# Altium PCB rs485.PcbDoc
Units mil, origin at the board's own origin, x right, y up, seen from the top; angles counter-clockwise.
Board outline 2519.68 x 1181.1 mil, 2 copper layers (Top Layer, Bottom Layer); 35 components, 33 nets, 133 pads, 0 vias.
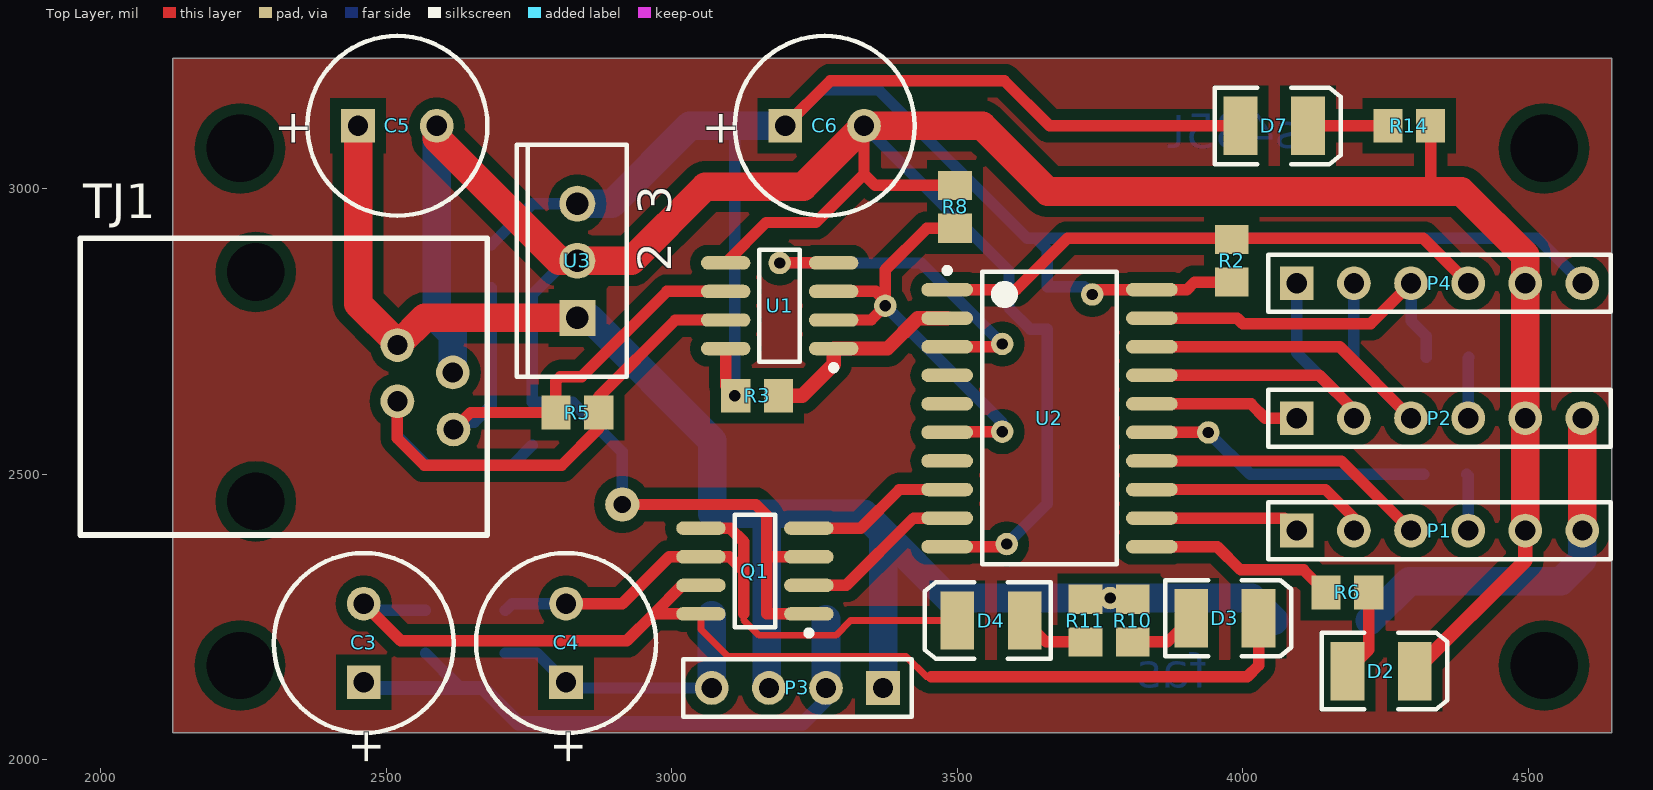
[diagram p0: Top Layer view]
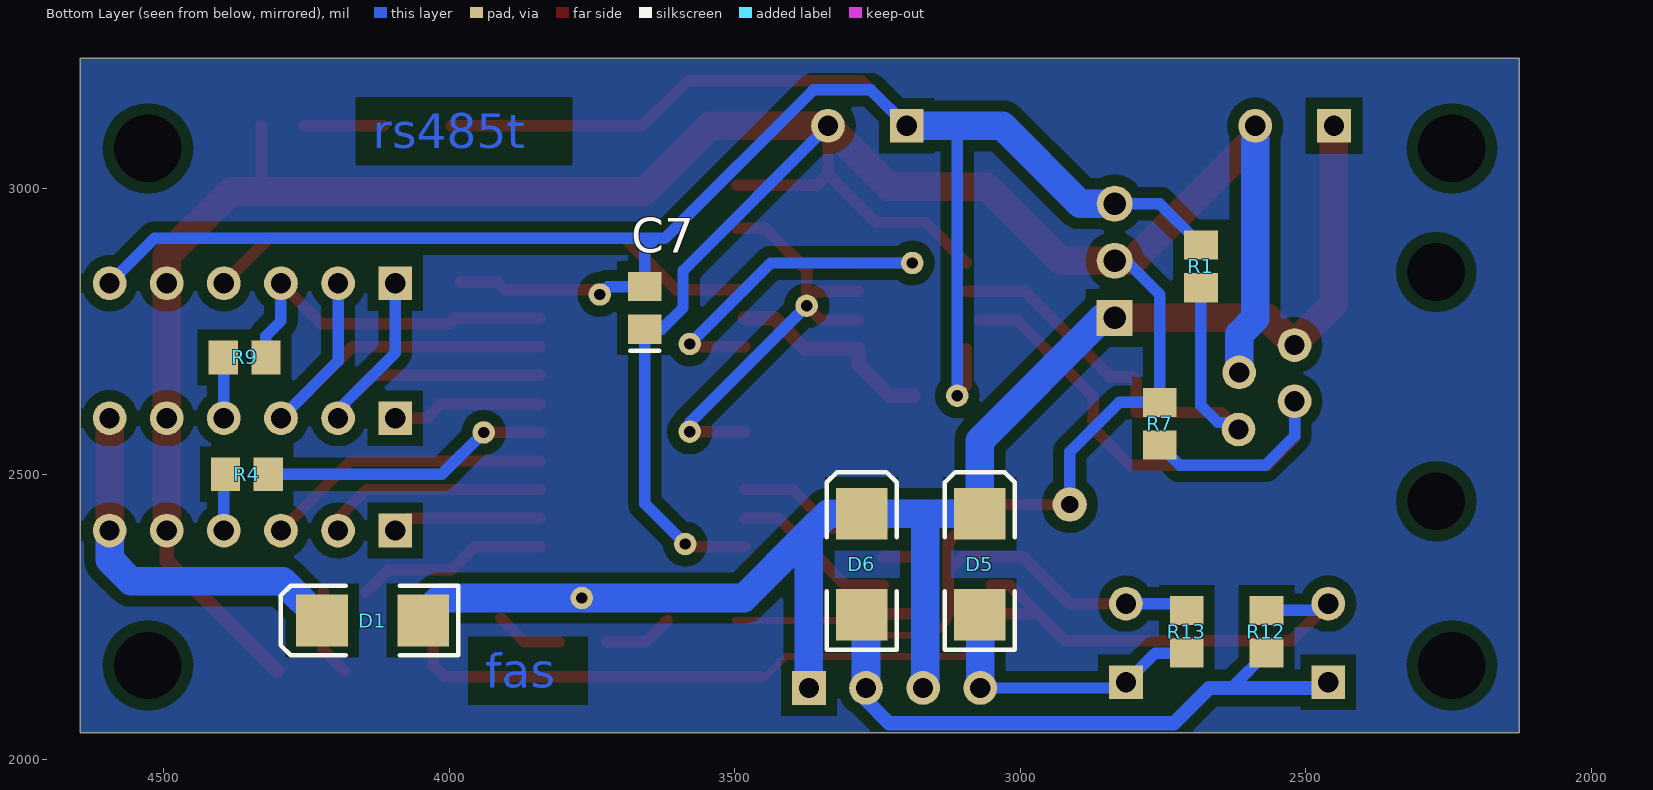
[diagram p1: Bottom Layer view, seen from below]

## Layer stack, top to bottom
Top Layer: signal copper 1.4
Dielectric: dielectric 12.6, FR-4, Dk 4.8
Bottom Layer: signal copper 1.4

## Board outline
2125.98,2047.24 4645.67,2047.24 4645.67,3228.35 2125.98,3228.35

## Design rules (kind name [scope] priority, off if disabled: settings)
Clearance [All] p1: gap=19.68
HoleSize [All] p1: absolutevalues=TRUE maxlimit=200 minlimit=1 maxpercent=80.000 minpercent=20.000
PolygonConnect [All] p1: connectstyle=Relief reliefconductorwidth=10 reliefentries=4 polygonreliefangle="90 Angle"
RoutingVias [All] p1: holewidth=28 width=50 viastyle="Through Hole" minholewidth=28 minwidth=50 maxholewidth=28 maxwidth=50
SilkscreenOverComponentPads [All] p1: minsilkscreentomaskgap=5
SolderMaskExpansion [All] p1: expansion=4
Width [All] p1: maxlimit=196.85 minlimit=10 preferedwidth=10
26 further rules are at their usual default settings.

## Components (designator, comment, footprint, x,y, rotation, side; value= is the part's Value field where it differs from the comment)
C3 "94SH107X0016EBP" E 2460.63,2204.72 r90 top
C4 "94SH107X0016EBP" E 2814.96,2204.72 r90 top
C5 "94SH107X0016EBP" E 2519.68,3110.24 r0 top
C6 "94SH107X0016EBP" E 3267.72,3110.24 r0 top
C7 "C0805" 0805 3657.48,2791.34 r90 bottom
D1 "D Schottky" SMB 4133.86,2244.09 r0 bottom
D2 "LED3" 3.5X2.8X1.9 4242.13,2155.51 r0 top
D3 "LED3" 3.5X2.8X1.9 3968.5,2248.03 r0 top
D4 "LED3" 3.5X2.8X1.9 3559.06,2244.09 r180 top
D5 "D Schottky" SMB 3070.87,2342.52 r90 bottom
D6 "D Schottky" SMB 3277.56,2342.52 r90 bottom
D7 "LED3" 3.5X2.8X1.9 4055.12,3110.24 r0 top
P1 "Header 6" HDR1X6 4094.49,2401.57 r0 top
P2 "Header 6" HDR1X6 4094.49,2598.43 r0 top
P3 "Header 4" HDR1X4 3370.08,2125.98 r180 top
P4 "Header 6" HDR1X6 4094.49,2834.65 r0 top
Q1 "IRF7313" SO-8_N 3145.67,2330.71 r180 top
R1 "ERAS" ERA-0805 2683.65,2864.17 r270 bottom
R2 "ERAS" ERA-0805 3980.32,2874.02 r90 top
R3 "ERAS" ERA-0805 3149.61,2637.8 r0 top
R4 "ERAS" ERA-0805 4354.33,2500 r0 bottom
R5 "ERAS" ERA-0805 2834.65,2608.27 r0 top
R6 "ERAS" ERA-0805 4183.07,2293.31 r0 top
R7 "ERAS" ERA-0805 2755.91,2588.58 r90 bottom
R8 "ERAS" ERA-0805 3496.06,2968.5 r90 top
R9 "ERAS" ERA-0805 4358.27,2704.72 r0 bottom
R10 "ERAS" ERA-0805 3807.09,2244.09 r270 top
R11 "ERAS" ERA-0805 3724.41,2244.09 r270 top
R12 "ERAS" ERA-0805 2568.9,2224.41 r90 bottom
R13 "ERAS" ERA-0805 2708.66,2224.41 r90 bottom
R14 "ERAS" ERA-0805 4291.34,3110.24 r0 top
TJ1 "TJ4-6P4C" TJ4-6P4C 2677.17,2913.39 r180 top
U1 "MAX485ESA" NSO8_N 3188.98,2795.28 r180 top
U2 "ATtiny2313-20SU" 20S_N 3661.42,2598.43 r0 top
U3 "MC7805ACT" 221A-06 2834.65,2874.02 r90 top

## Footprints (in the part's own frame and the unit in brackets; to place one, negate y for a bottom-side part, rotate by r counter-clockwise, add the part's x,y. Pads: shape width x height; smd on the part's side, far side on the other; paste and mask are expansions set on the pad)
3.5X2.8X1.9 [mm] "SM LED; 2 C-Bend Leads; Body 3.5 x 2.8 x 1.9 mm, inc leads (LxWxH typ)"
  rect 1.5x2.6 smd: 1(-1.5,0) 2(1.5,0)
  silkscreen extent -2.65,-1.7 2.95,1.7
20S_N [mm] "SOIC, 20-Leads, Body 12.8x7.5mm, Pitch 1.27mm, IPC Medium Density"
  oval 2.3x0.6 smd: 1(-4.55,5.715) 2(-4.55,4.445) 3(-4.55,3.175) 4(-4.55,1.905) 5(-4.55,0.635) 6(-4.55,-0.635) 7(-4.55,-1.905) 8(-4.55,-3.175) 9(-4.55,-4.445) 10(-4.55,-5.715) 11(4.55,-5.715) 12(4.55,-4.445) 13(4.55,-3.175) 14(4.55,-1.905) 15(4.55,-0.635) 16(4.55,0.635) 17(4.55,1.905) 18(4.55,3.175) 19(4.55,4.445) 20(4.55,5.715)
  silkscreen extent -4.67,-6.5 3,6.69, body extent -3.75,-6.5 3.75,6.5, height 2.65
221A-06 [mm] "TO, Thru-Hole, Vertical, Heatsink Mounted; 3 In-Line Leads; Pitch 2.54 mm"
  rect 1.6x1.6 hole 1: 1(-2.54,0)
  round 1.6 hole 1: 2(0,0) 3(2.54,0)
  silkscreen extent -5.15,-2.2 5.15,2.7
0805 [mm] "Chip Capacitor; Body 2.0 x 1.2 mm (LxW typ)"
  rect 1.3x1.5 smd: 1(-0.95,0) 2(0.95,0)
  silkscreen extent -1.9,-0.65 -1.9,0.65
E [mm] "Capacitor, Electrolytic, Radial; Body 8 x 10.5 mm (Dia.xH typ); Pin Spacing 3.5 mm (typ)"
  rect 1.5x1.5 hole 0.9: 1(-1.75,0)
  round 1.5 hole 0.9: 2(1.75,0)
  silkscreen extent -4,-4 4,4
ERA-0805 [mm] "Chip Resistor; Body 2 x 1.3 mm (LxW typ)"
  rect 1.3x1.5 smd: 1(-0.95,0) 2(0.95,0)
HDR1X4 [mm] "Connector; Header; 4 Position"
  rect 1.5x1.5 hole 0.9: 1(0,0)
  round 1.5 hole 0.9: 2(2.54,0) 3(5.08,0) 4(7.62,0)
  silkscreen extent -1.27,-1.27 8.89,1.27
HDR1X6 [mm] "Connector; Header; 6 Position"
  rect 1.5x1.5 hole 0.9: 1(0,0)
  round 1.5 hole 0.9: 2(2.54,0) 3(5.08,0) 4(7.62,0) 5(10.16,0) 6(12.7,0)
  silkscreen extent -1.27,-1.27 13.97,1.27
NSO8_N [mm] "SOIC, 8-Leads, Body 4.9x3.9mm, Pitch 1.27mm, IPC Medium Density"
  oval 2.2x0.6 smd: 1(-2.4,1.905) 2(-2.4,0.635) 3(-2.4,-0.635) 4(-2.4,-1.905) 5(2.4,-1.905) 6(2.4,-0.635) 7(2.4,0.635) 8(2.4,1.905)
  silkscreen extent -2.53,-2.5 0.9,2.88, body extent -2,-2.5 2,2.5, height 1.75
SMB [mm] "DO-214-AA/SMB; 2 C-Bend Leads; Body 5.3 x 3.6 mm, inc. leads (LxW)"
  rect 2.3x2.3 smd: 1(-2.25,0) 2(2.25,0)
  silkscreen extent -3.8,-1.55 4.1,1.55
SO-8_N [mm] "SOIC, 8-Leads, Body 4.9x3.9mm, Pitch 1.27mm, IPC Medium Density"
  oval 2.2x0.6 smd: 1(-2.4,1.905) 2(-2.4,0.635) 3(-2.4,-0.635) 4(-2.4,-1.905) 5(2.4,-1.905) 6(2.4,-0.635) 7(2.4,0.635) 8(2.4,1.905)
  silkscreen extent -2.53,-2.5 0.9,2.88, body extent -2,-2.5 2,2.5, height 1.75
TJ4-6P4C [mm]
  round 1.524 hole 2.56: 0(10.3,11.7) 0(10.3,1.5)
  round 1.5 hole 0.9: 1(1.535,5.965) 2(4,4.75) 3(1.505,8.505) 4(4,7.25)
  silkscreen extent 0,0 18.1,13.2

## Part data
C3 C4 C5 C6: "Solid Aluminum Capacitor with Organic Semiconductor Electrolyte: 100uF, 16V, Bulk Pack"
C7: "Ceramic Chip Capacitor - Standard"
D1 D5 D6: "Schottky Diode"
D2 D3 D4 D7: "Typical BLUE SiC LED"
P1 P2 P4: "Header, 6-Pin"
P3: "Header, 4-Pin"
Q1: "HEXFET Power MOSFET"
R1 R2 R3 R4 R5 R6 R7 R8 R9 R10 R11 R12 R13 R14: "Metal Film Thermosensitive Chip Resistor, 0.56 Ohm to 10k Ohm Range, 5% Tolerance, 0805 Size, 0.1 W"
U1: "Low-Power, Slew-Rate-Limited RS-485/RS-422 Transceiver"
U2: "Low Power tinyAVR® 8-Bit Microcontroller, 2K Flash Memory, 20MHz, Industrial Temperature, 20-Lead SOIC, Pb-Free"
U3: "Three-Terminal Positive Voltage Regulator"

## Free pads (board coordinates)
  round 60 hole 30: 0(2913.39,2447.2)
  round 39.37 hole 19.68: 0(3578.74,2728.35) 1(3188.98,2870.08) 2(3374.02,2795.28) 3(3578.74,2574.8) 5(3736.22,2814.96) 6(3586.61,2377.95) 7(3939.57,2573.43) 8(3110.24,2637.8) 9(3767.72,2283.46)
  round 60 hole 118.11: 10(2244.09,2165.35) 10(2244.09,3070.87) 10(4527.56,2165.35) 10(4527.56,3070.87)

## Nets (pads, with @x,y where several pads share a name; then routed paths per layer and width w, separated by ;. In a path a pad name is that pad's centre, name@x,y a point inside that pad or via, vN(x,y) a via of type N, cw(c..) or ccw(c..) an arc to the next point about the centre after c; other vN are vias at no path point)
+12V: C5.1 D1.1 D5.2 D6.2 P3.1 P3.3 pad.9 R10.1 R11.1 TJ1.2 U3.1 | length 2824.6
  Top Layer w50: C5.1 2450.79,2798.81 2521.45,2728.14 2567.32,2774.02 U3.1
  Bottom Layer w50: U3.1 2855.91,2774.02 3070.87,2559.06 D5.2 D6.2 3336.61,2431.1 3370.08,2397.64 ; P3.3@3166.14,2125.98 3166.14,2420.47 ; P3.1 3370.08,2397.64 ; D1.1@4055.12,2244.09 4015.75,2283.46 pad.9 3484.25,2283.46 3370.08,2397.64
GND: C5.2 C6.2 C7.1 D2.2 P1.5 P2.5 P4.5 pad.0@2913.39,2447.2 pad.6 Q1.1 Q1.3 R7.2 R8.2 R14.2 TJ1.1 U1.5 U2.10 U3.2 | length 6303.3
  Top Layer w20: C5.2 C5.2@2588.58,3120.08 ; pad.0@2913.39,2447.2 3147.28,2447.2 3166.14,2428.35 3166.14,2255.71 Q1.1 ; U1.5 3165.16,2940.94 3251.97,2940.94 3336.61,3025.59 ; 3169.29,2355.71 Q1.3 ; C6.2 3336.61,3025.59 ; U2.10 3582.09,2373.43 pad.6 ; R8.2 3356.3,3005.91 3336.61,3025.59 ; 4328.74,2997.24 R14.2
  Top Layer w25: D2.2 4494.49,2348.82 P1.5
  Top Layer w50: C5.2 2588.58,3088.58 2803.15,2874.02 U3.2 2929.13,2874.02 3059.06,3003.94 3230.31,3003.94 C6.2 3543.31,3110.24 3658.27,2995.28 4382.68,2995.28 4494.49,2883.46 P4.5 P2.5 P1.5
  Bottom Layer w20: U3.2 2814.96,2874.02 2755.91,2814.96 R7.2 2826.77,2625.98 2913.39,2539.37 pad.0@2913.39,2447.2 ; C6.2 3590.55,2856.3 3590.55,2791.34 3627.95,2753.94 C7.1 3657.48,2448.82 pad.6
  Bottom Layer w50: C5.2 2588.58,2773.16 2616.73,2745.01 TJ1.1@2616.73,2690.26
NetC1_2: U2.4
NetC2_2: U2.5
NetC3_1: C3.1 D6.1 P3.2 R12.1 | length 1083.1
  Bottom Layer w20: R12.1 2627.95,2127.95 2627.95,2125.98
  Bottom Layer w25: C3.1 2470.47,2125.98 2627.95,2125.98 2669.29,2125.98 2731,2064.27 3229.63,2064.27 3270.08,2104.72 P3.2
  Bottom Layer w50: P3.2 D6.1@3270.08,2246.46
NetC3_2: C3.2 D3.2 Q1.7 Q1.8 R12.2 | length 1982.5
  Top Layer w12: Q1.8 3051.18,2228.35 3098.33,2181.2 3410.25,2181.2 3445.77,2145.67 3454.72,2145.67
  Top Layer w20: C3.2 2525.59,2208.66 2921.26,2208.66 2968.31,2255.71 ; Q1.8 2968.31,2255.71 ; Q1.7 3018.31,2305.71 2968.31,2255.71 ; 3454.72,2145.67 4007.87,2145.67 4027.56,2165.35 D3.2
  Bottom Layer w20: C3.2 2472.44,2261.81 R12.2
NetC4_1: C4.1 D5.1 P3.4 R13.1 | length 513.9
  Bottom Layer w20: R13.1 2763.78,2187.01 C4.1 2824.8,2125.98 P3.4
  Bottom Layer w50: P3.4 D5.1@3070.08,2253.15
NetC4_2: C4.2 D4.2 Q1.5 Q1.6 R13.2 | length 1083.7
  Top Layer w12: 3125.98,2255.91 3125.98,2245.4 3153.17,2218.21 3287.18,2218.21 3313.07,2244.09 D4.2
  Top Layer w20: C4.2 2913.39,2273.62 2995.47,2355.71 Q1.6 3100.98,2355.71 3125.98,2330.71 ; Q1.5 3102.17,2405.71 3125.98,2381.89 3125.98,2330.71 ; 3125.98,2255.91 3125.98,2330.71
  Bottom Layer w20: R13.2 2720.47,2273.62 C4.2
NetD1_2: D1.2 P1.6 P2.6 | length 664.1
  Top Layer w50: P1.6 P2.6
  Bottom Layer w50: D1.2 4291.34,2312.99 4557.09,2312.99 4594.49,2350.39 P1.6
NetD2_1: D2.1 R6.2 | length 153.3
  Top Layer w20: D2.1 4220.47,2192.91 R6.2
NetD3_1: D3.1 R10.2 | length 119.5
  Top Layer w20: R10.2 3868.11,2206.69 D3.1
NetD4_1: D4.1 R11.2 | length 121.8
  Top Layer w20: D4.1 3655.51,2206.69 R11.2
NetD7_2: D7.2 R14.1 | length 139.8
  Top Layer w20: D7.2 R14.1
NetP1_1: P1.1 U2.12 | length 263
  Top Layer w20: U2.12 4072.64,2423.43 P1.1
NetP1_2: P1.2 U2.13 | length 396.6
  Top Layer w20: U2.13 4144.69,2473.43 4194.49,2423.62 P1.2
NetP1_3: P1.3 U2.14 | length 504.4
  Top Layer w20: U2.14 4172.64,2523.43 P1.3
NetP1_4: P1.4 R4.2 | length 99.6
  Bottom Layer w20: R4.2 4394.49,2497.24 P1.4
NetP2_1: P2.1 U2.16 | length 264.3
  Top Layer w20: U2.16 4014.37,2623.43 4039.37,2598.43 P2.1
NetP2_2: P2.2 P4.1 U2.17 | length 670.9
  Top Layer w20: U2.17 4133.66,2673.43 4194.49,2612.6 P2.2
  Bottom Layer w20: P4.1 4094.49,2712.6 4194.49,2612.6 P2.2
NetP2_3: P2.3 P4.2 U2.18 | length 783.4
  Top Layer w20: U2.18 4169.49,2723.43 P2.3
  Bottom Layer w20: P4.2 4194.49,2698.43 P2.3
NetP2_4: P2.4 R9.2 | length 106.8
  Bottom Layer w20: P2.4 4394.49,2703.54 R9.2
NetP4_3: P4.3 R9.1 U2.19 | length 628.1
  Top Layer w20: U2.19 3990.35,2773.43 4000,2763.78 4223.62,2763.78 P4.3
  Bottom Layer w20: P4.3 4294.49,2768.5 4320.87,2742.13 R9.1
NetP4_4: P4.4 R2.2 U2.1 | length 982.1
  Top Layer w20: U2.1 3602.95,2823.43 3692.91,2913.39 4315.75,2913.39 P4.4
NetQ1_2: Q1.2 U2.9 | length 290.9
  Top Layer w20: Q1.2 3305.71,2305.71 3423.43,2423.43 U2.9
NetQ1_4: Q1.4 U2.8 | length 270.2
  Top Layer w20: Q1.4 3330.91,2405.71 3398.62,2473.43 U2.8
NetR1_2: R1.2 R5.1 TJ1.3 U1.6 | length 893.2
  Top Layer w20: TJ1.3 2647.64,2608.27 R5.1 2797.24,2663.39 2805.12,2671.26 2842.52,2671.26 2991.54,2820.28 U1.6
  Bottom Layer w20: TJ1.3@2617.91,2590.87 2653.86,2590.87 2683.65,2620.65 R1.2
NetR3_2: R3.2 U1.1 U2.2 | length 367.5
  Top Layer w25: R3.2 3228.35,2637.8 3283.46,2692.91 U1.1 3377.76,2720.28 3430.91,2773.43 U2.2
NetR4_1: pad.7 R4.1 U2.15 | length 506.8
  Top Layer w20: U2.15 pad.7
  Bottom Layer w20: pad.7 4012.99,2500 R4.1
NetR5_2: R5.2 R7.1 TJ1.4 U1.7 | length 1106.5
  Top Layer w20: TJ1.4 2519.69,2562.99 2566.93,2515.75 2807.09,2515.75 2872.05,2580.71 R5.2 2872.05,2635.83 3006.5,2770.28 U1.7@3070.87,2770.28
  Bottom Layer w20: TJ1.4 2519.69,2566.93 2570.87,2515.75 2720.47,2515.75 R7.1
NetR6_1: R6.1 U2.11 | length 338.3
  Top Layer w20: U2.11 3955.31,2373.43 3996.06,2332.68 4106.3,2332.68 R6.1
NetR8_1: pad.2 pad.3 R8.1 U1.2 U1.3 U2.6 | length 816.1
  Top Layer w20: U1.2 3349.02,2770.28 pad.2 pad.2@3374.02,2803.15 ; U1.3 3356.89,2820.28 pad.2@3374.02,2803.15 ; U2.6 3483.66,2574.8 pad.3 ; R8.1 3446.85,2931.1 3374.02,2858.27 pad.2@3374.02,2803.15
  Bottom Layer w20: pad.2 3578.74,2590.55 pad.3
NetU1_4: pad.0@3578.74,2728.35 pad.1 U1.4 U2.3 | length 634.4
  Top Layer w20: pad.1 pad.1@3189.09,2870.04 ; pad.1@3189.17,2870.28 U1.4 ; U2.3 pad.0@3573.82,2723.43
  Bottom Layer w20: pad.1 3437.01,2870.08 pad.0@3578.74,2728.35
VCC: C6.1 C7.2 D7.1 P4.6 pad.5 pad.8 R1.1 R2.1 R3.1 U1.8 U2.20 U3.3 | length 4018.7
  Top Layer w20: U1.8 3094.49,2655.51 R3.1 ; C6.1 3277.56,3188.98 3582.68,3188.98 3661.42,3110.24 D7.1 ; pad.5 3744.69,2823.43 U2.20 3902.17,2823.43 3915.35,2836.61 R2.1
  Bottom Layer w20: R1.1 2756.09,2974.02 U3.3 ; pad.8 3110.24,3110.24 ; C6.1 3261.81,3173.23 3362.2,3173.23 3622.05,2913.39 3637.8,2913.39 ; pad.5 3722.44,2828.74 C7.2 3657.48,2893.7 3637.8,2913.39 ; P4.6 4515.75,2913.39 3637.8,2913.39
  Bottom Layer w50: U3.3 2895.28,2974.02 3031.5,3110.24 3110.24,3110.24 C6.1
pads on no net: TJ1.0 U2.7

## Polygon pours and split planes (outlines as drawn)
no net on Top Layer "Top Layer-No Net" (solid, pour order 6): 4645.67,3228.35 4645.67,2086.61 4645.67,2051.86 4641.05,2047.24 2125.98,2047.24 2125.98,3228.35
no net on Bottom Layer "Top Layer-No Net" (solid, pour order 10): 4645.67,3228.35 4645.67,2047.24 2125.98,2047.24 2125.98,3228.35

## Other copper
Bottom Layer:
  text "rs485t" at 4133.86,3070.87 h60
  text "fas" at 3937.01,2125.98 h60

## Silkscreen, mask and mechanical layers (free items; w line width, h text height)
Mechanical 15:
  the board outline again, w10
Mechanical 31:
  lines w10: 2125.98,2056.48 2130.6,2051.86 4645.67,2051.86 4645.67,3228.35 2125.98,3228.35 2125.98,2056.48

## Text inside footprints (layer, text, board x,y; h text height)
C3: Top Overlay "+" at 2490.16,1989.17 h59.06 r90
C4: Top Overlay "+" at 2844.49,1989.17 h59.06 r90
C5: Top Overlay "+" at 2304.13,3080.71 h59.06
C6: Top Overlay "+" at 3052.17,3080.71 h59.06
U3: Top Overlay "2" at 2999.02,2854.33 h59.06 r90; Top Overlay "3" at 2999.02,2954.33 h59.06 r90